# Altium PCB 二级.pcbdoc
Units mm, origin at the board's own origin, x right, y up, seen from the top; angles counter-clockwise.
Board outline 32.38 x 37.76 mm, 2 copper layers (Top Layer, Bottom Layer); 1 components, 0 nets, 3 pads, 0 vias.
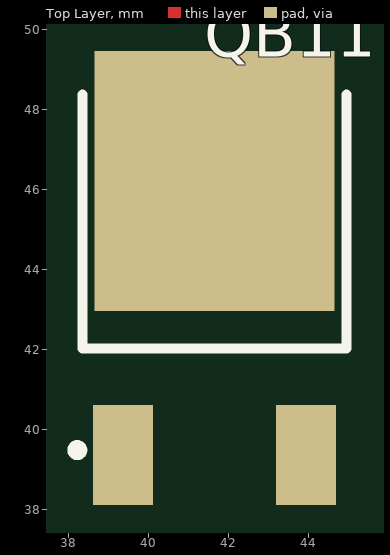
[diagram p0: Top Layer view]
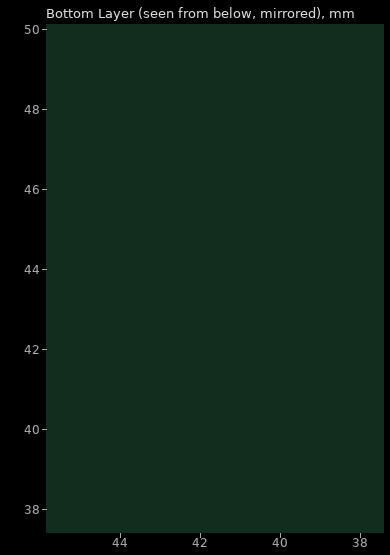
[diagram p1: Bottom Layer view, seen from below]

## Layer stack, top to bottom
Top Layer: signal copper (thickness not stored)
Dielectric: dielectric 0.32, FR-4, Dk 4.8
Bottom Layer: signal copper (thickness not stored)

## Board outline
57.785,25.4 25.4,25.4 25.4,63.158 57.785,63.158

## Components (designator, comment, footprint, x,y, rotation, side; value= is the part's Value field where it differs from the comment)
QB11 "TO-252AB_L6.5-W6.0-P4.50-LS11.6-BR" TO-252AB_L6.5-W6.0-P4.50-LS11.6-BR 41.656,42.775 r0 top

## Footprints (in the part's own frame and the unit in brackets; to place one, negate y for a bottom-side part, rotate by r counter-clockwise, add the part's x,y. Pads: shape width x height; smd on the part's side, far side on the other; paste and mask are expansions set on the pad)
TO-252AB_L6.5-W6.0-P4.50-LS11.6-BR [mm]
  rect 1.5x2.5 smd: 1(-2.285,-3.425) 3(2.285,-3.425)
  rect 6x6.5 smd: 2(0,3.425)
  silkscreen extent -3.56,-3.42 3.3,5.59

## Nets (pads, with @x,y where several pads share a name; then routed paths per layer and width w, separated by ;. In a path a pad name is that pad's centre, name@x,y a point inside that pad or via, vN(x,y) a via of type N, cw(c..) or ccw(c..) an arc to the next point about the centre after c; other vN are vias at no path point)
pads on no net: QB11.1 QB11.2 QB11.3

## Silkscreen, mask and mechanical layers (free items; w line width, h text height)
Document:
  lines w0.003: 41.567,44.254 41.618,44.305